# Altium PCB B.O.BREV00 PCB.PcbDoc
Units mil, origin at the board's own origin, x right, y up, seen from the top; angles counter-clockwise.
Board outline 1580 x 3915 mil, 2 copper layers (Top Layer, Bottom Layer); 26 components, 21 nets, 113 pads, 86 vias.
Unrouted connection lines stored in the file: 39.
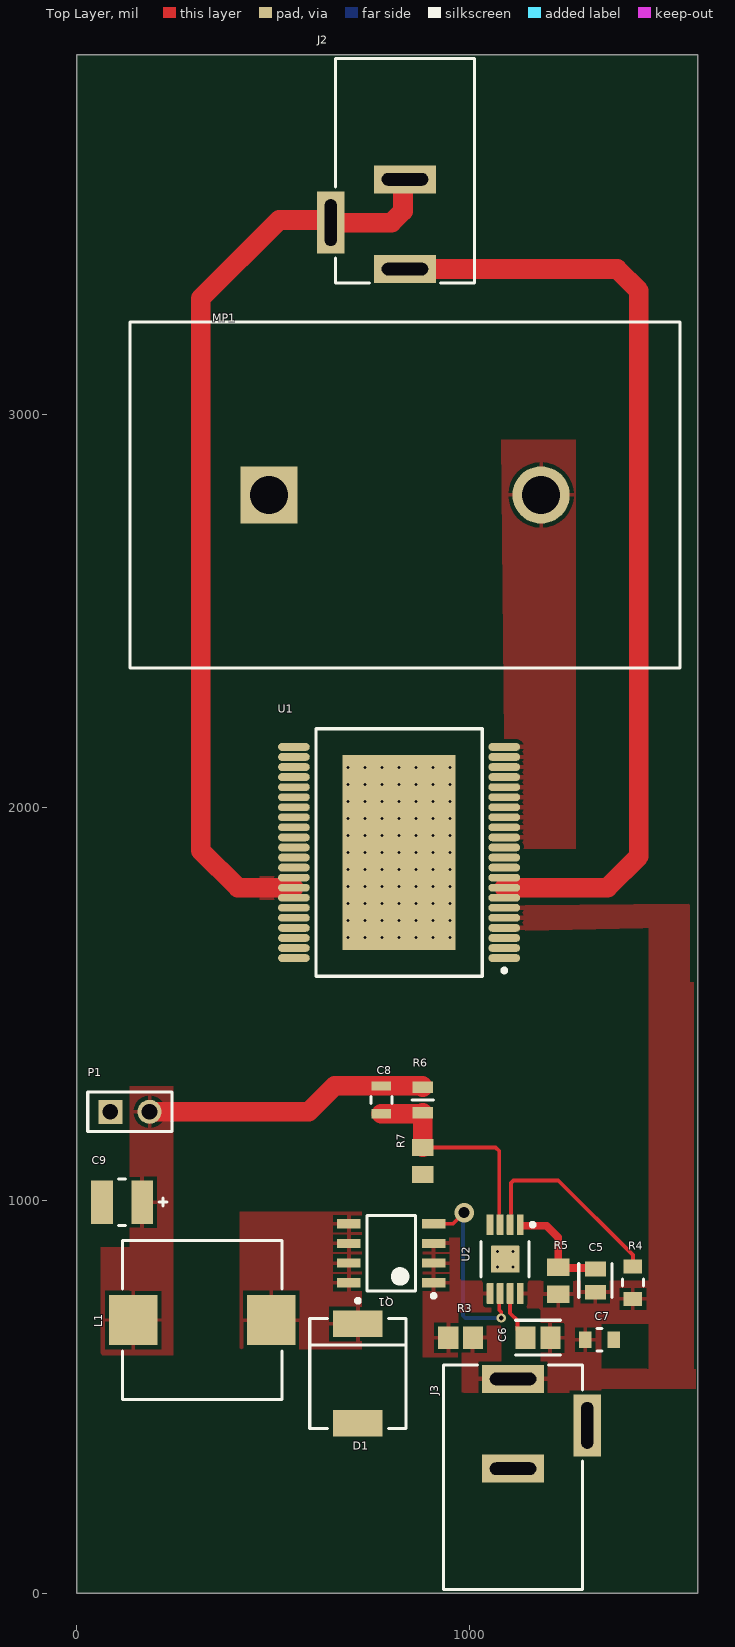
[diagram p0: Top Layer view]
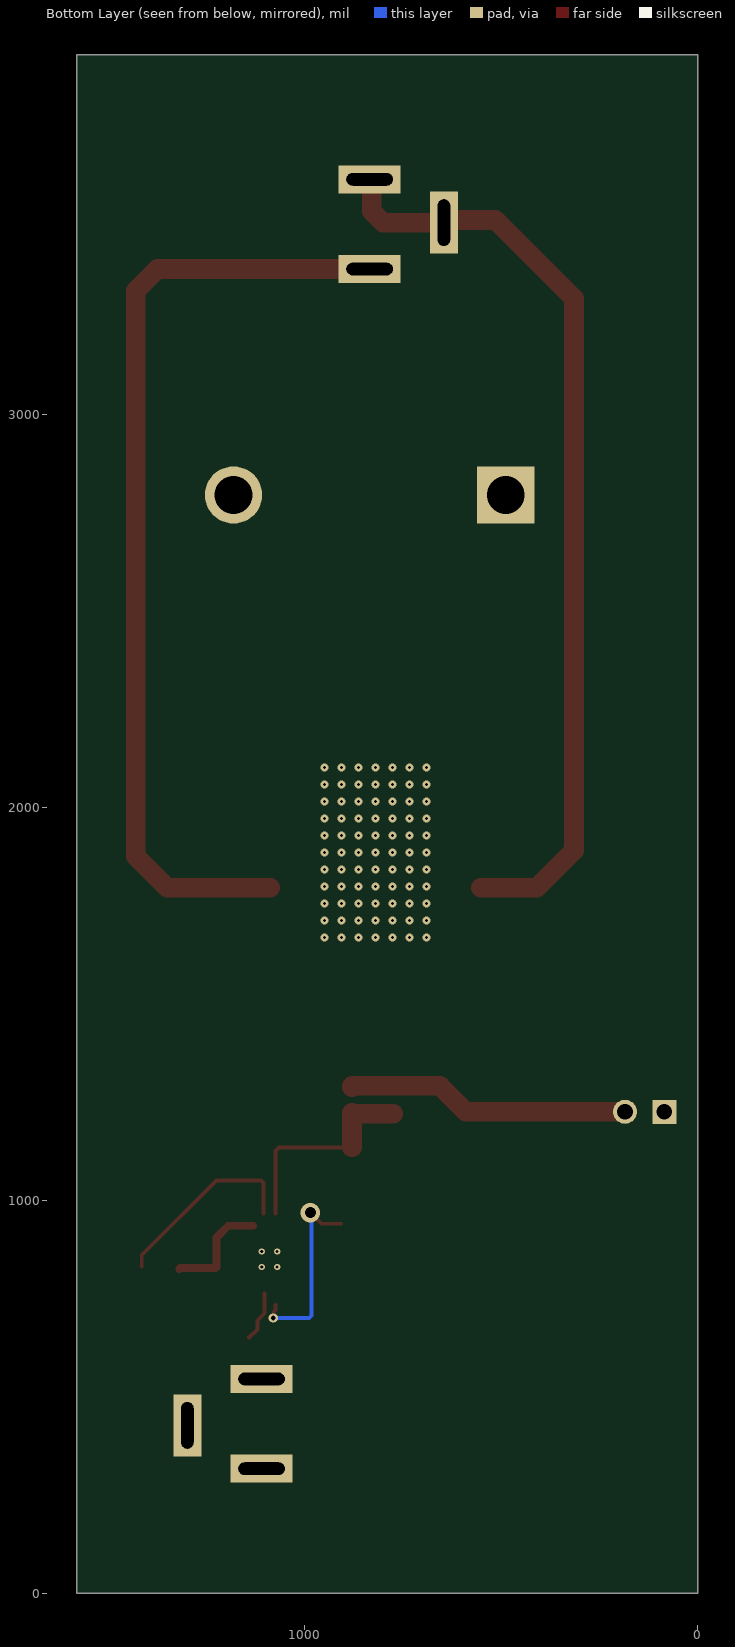
[diagram p1: Bottom Layer view, seen from below]

## Layer stack, top to bottom
Top Solder: solder mask 0.4, Solder Resist, Dk 3.5
Top Layer: signal copper 1.4
Dielectric 1: dielectric 12.6, FR-4, Dk 4.8
Bottom Layer: signal copper 1.4
Bottom Solder: solder mask 0.4, Solder Resist, Dk 3.5

## Board outline
0,0 1580,0 1580,3915 0,3915

## Design rules (kind name [scope] priority, off if disabled: settings)
Clearance [All] p1: gap=10 ignorepadtopadclearanceinfootprint=FALSE except(0: Arc-Hole Track-Hole SMDPad-Hole THPad-Hole Via-Hole Fill-Hole Poly-Hole Region-Hole Text-Hole)
PolygonConnect [All] p1: connectstyle=Relief reliefconductorwidth=10 reliefentries=4 polygonreliefangle="90 Angle" airgapwidth=10
RoomDefinition "Power Management" [InComponentClass('Power Management')] p1: confinementstyle=ConfineIn formatcopy=TRUE lockcomponents=FALSE outline 3194.45,150 7154.45,150 7154.45,850 3194.45,850
RoomDefinition "Motor Driver" [InComponentClass('Motor Driver')] p2: confinementstyle=ConfineIn formatcopy=TRUE lockcomponents=FALSE outline 4260,1488.58 6975,1488.58 6975,2603.58 4260,2603.58
RoutingVias [All] p1: holewidth=28 width=50 viastyle="Through Hole" minholewidth=28 minwidth=50 maxholewidth=28 maxwidth=50
SolderMaskExpansion [All] p1: expansion=4 istentingtop=FALSE
Width [All] p1: maxlimit=100 minlimit=10 preferedwidth=20 minimp=50.000000 maximp=50.000000 favimp=50.000000
30 further rules are at their usual default settings.

## Classes and differential pairs
component class "Power Management": C5 C6 C7 C8 C9 D1 J3 L1 P1 Q1 R3 R4 R5 R6 R7 U2
component class "Motor Driver": C1 C2 C3 C4 J1 J2 MP1 R1 R2 U1

## Components (designator, comment, footprint, x,y, rotation, side; value= is the part's Value field where it differs from the comment)
C1 "100uF, 16V" FP-TAJF-MFG 6395,2328.58 r90 top
C2 "100nF, 16V" CAPC3216X180X55LL20T25 6600,2453.58 r0 top
C3 "47nF, 50V" FP-0805-L_2_01_0_2-W_1_25-IPC_C 6210,2448.58 r0 top
C4 "1uF, 16V" FP-GCM219-0_15-MFG 5855,2458.58 r0 top
C5 "1nF, 25V" FP-C0805C-DN-MFG 1319.49,795.47 r270 top value="1,000 pF"
C6 "470nF, 16V" FP-0805-L_2_01_0_2-W_1_25-IPC_B 1173.28,650 r180 top
C7 "10uF, 16V" FP-C2012-125-0_2-MFG 1330,645 r0 top
C8 "1.1nF, 16V, 0805 (Find new one on Digikey)" FP-GRM216-0_1-MFG 775,1255.43 r270 top
C9 "33uF" FP-TAJB-MFG 115,995 r0 top
D1 "" FP-95402-MFG 715,558.82 r270 top
J1 "5-146256-2" FP-5-146256-2-MFG 6860,2383.58 r0 top
J2 "24V,5A" 694106301002 835,3620 r180 top
J3 "24V,5A" 694106301002 1110,295 r0 top
L1 "10uH, 7.5A" FP-IHLP-4040DZ-FP_3_124x3-MFG 319,695 r180 top
MP1 "R2A-CT4-38E" FP-R2A-CT4-38E-MFG 835,2795 r0 top
P1 "TSW-102-26-G-S" SMTC-TSW-102-26-XX-S 85,1225 r0 top
Q1 "20A" ONSC-SOIC-8-751-07_V 800,865 r180 top
R1 "1K" FP-RC0805-0_6-MFG 6035,2463.58 r0 top
R2 "270R, 1%" FP-CR0805-IPC_B 5680,2448.58 r0 top
R3 "10m" RESC2013X75X55NL20T20 976.5,650 r0 top
R4 "44.2k, 0.1%" FP-RT0805-MFG 1415,790 r90 top value=44.2KΩ
R5 "1.05k" RESC2013X70X40NL20T20 1225,795 r270 top
R6 "10k, 0.1%" FP-MCU0805-IPC_C 880,1255 r90 top
R7 "3.32k.0.1%" RESC2013X55X40NL15T20 880,1100 r90 top
U1 "12VDC, 5A" SOP65P1420X340_HS-45N 820,1885 r180 top
U2 "LM5085MYE/NOPB" DGN0008A_N 1090,850 r270 top

## Footprints (in the part's own frame and the unit in brackets; to place one, negate y for a bottom-side part, rotate by r counter-clockwise, add the part's x,y. Pads: shape width x height; smd on the part's side, far side on the other; paste and mask are expansions set on the pad)
694106301002 [mm] "DC Power Jack Right Angled(6.4)"
  rect 4x1.8 hole 0.8 slot 3 at 0 deg: 1(0,6.35) 2(0,0.55)
  rect 1.8x4 hole 0.8 slot 3 at 90 deg: 3(4.8,3.35)
  silkscreen extent -4.5,-7.25 4.5,7.25, body extent -4.5,-7.25 5,7.25, height 10.75
CAPC3216X180X55LL20T25 [mm] "Chip Capacitor, 2-Leads, Body 3.4x1.8mm, IPC High Density"
  rect 1.15x1.7 smd: 1(-1.275,0) 2(1.275,0)
  silkscreen extent -0.3,-0.75 0.3,0.75, body extent -1.7,-0.9 1.7,0.9, height 1.8
DGN0008A_N [mm] "TSOP, 8-Leads, Body 3.1x3.1mm, Pitch 0.65mm, Thermal Pad 1.85x1.73mm, IPC Medium Density"
  rrect22% 1.35x0.45 smd: 1(-2.225,0.975) 2(-2.225,0.325) 3(-2.225,-0.325) 4(-2.225,-0.975) 5(2.225,-0.975) 6(2.225,-0.325) 7(2.225,0.325) 8(2.225,0.975)
  rrect6% 1.73x1.85 smd: 9(0,0)
  silkscreen extent -2.35,-1.55 1.15,1.9, body extent -2.45,-1.5 2.45,1.5, height 0.94
FP-5-146256-2-MFG [mm]
  rect 0.76x2.29 smd far side paste+0 mask+0: 1(-1.27,-1.395) 2(-1.27,1.395) 3(1.27,-1.395) 4(1.27,1.395)
  rect 1.39x1.39 hole 0.89 paste-1000 mask+0: 1(-1.27,-1.27)
  silkscreen extent -3.31,-2.7 2.59,2.7, body extent -2.69,-2.8 2.69,2.8, height 0.25
FP-0805-L_2_01_0_2-W_1_25-IPC_B [mil]
  rect 51.36x57.33 smd paste+0 mask+0: 1(-31.72,0) 2(31.72,0)
  silkscreen extent -57,-44 57,44, body extent -67,-39 67,39, height 10
FP-0805-L_2_01_0_2-W_1_25-IPC_C [mil]
  rect 43.49x53.39 smd paste+0 mask+0: 1(-27.79,0) 2(27.79,0)
  silkscreen extent -50,-44 50,44, body extent -53,-32 53,32, height 10
FP-95402-MFG [mm]
  rect 1.72x3.2 smd paste+0 mask+0: 1(-3.205,0) 2(3.205,0)
  silkscreen extent -4.82,-3.11 3.55,3.11, body extent -4.17,-3.21 4.17,3.21, height 0.25
FP-C0805C-DN-MFG [mm]
  rect 0.95x1.35 smd paste+0 mask+0: 1(-0.75,0) 2(0.75,0)
  silkscreen extent -1.1,-1.07 1.1,1.07, body extent -1.4,-0.85 1.4,0.85, height 0.25
FP-C2012-125-0_2-MFG [mm]
  rect 0.8x1.05 smd paste+0 mask+0: 1(-0.925,0) 2(0.925,0)
  silkscreen extent -0.15,-0.72 0.15,0.72, body extent -1.43,-0.82 1.43,0.82, height 0.25
FP-CR0805-IPC_B [mil]
  rect 41.66x53.63 smd paste+0 mask+0: 1(-34.53,0) 2(34.53,0)
  silkscreen extent -55,-43 55,43, body extent -65,-37 65,37, height 10
FP-GCM219-0_15-MFG [mm]
  rect 0.7x1.3 smd paste+0 mask+0: 1(-0.95,0) 2(0.95,0)
  silkscreen extent -0.23,-0.7 0.23,0.7, body extent -1.4,-0.8 1.4,0.8, height 0.25
FP-GRM216-0_1-MFG [mm]
  rect 0.6x1.25 smd paste+0 mask+0: 1(-0.9,0) 2(0.9,0)
  silkscreen extent -0.23,-0.67 0.23,0.67, body extent -1.3,-0.77 1.3,0.77, height 0.25
FP-IHLP-4040DZ-FP_3_124x3-MFG [mil]
  rect 122.99x127.99 smd paste+0 mask+0: 1(-176,0) 2(176,0)
  silkscreen extent -203,-203 202,203, body extent -241,-206 241,206, height 10
FP-MCU0805-IPC_C [mil]
  rect 29.87x51.5 smd paste+0 mask+0: 1(-32.55,0) 2(32.55,0)
  silkscreen extent 0,-28 0,28, body extent -51,-31 51,31, height 10
FP-R2A-CT4-38E-MFG [mm]
  rect 3.7x3.7 hole 2.45 paste-1000 mask+0: 1(-8.8,0)
  round 3.7 hole 2.45 paste-1000 mask+0: 2(8.8,0)
  silkscreen extent -17.78,-11.18 17.78,11.18, body extent -17.88,-11.28 17.88,11.28, height 0.25
FP-RC0805-0_6-MFG [mm]
  rect 0.9x1.2 smd paste+0 mask+0: 1(-1.05,0) 2(1.05,0)
  silkscreen extent -0.23,-0.67 0.23,0.67, body extent -1.6,-0.77 1.6,0.77, height 0.25
FP-RT0805-MFG [mm]
  rect 0.9x1.2 smd paste+0 mask+0: 1(-1.05,0) 2(1.05,0)
  silkscreen extent -0.23,-0.67 0.23,0.67, body extent -1.6,-0.77 1.6,0.77, height 0.25
FP-TAJB-MFG [mm]
  rect 1.4x2.8 smd paste+0 mask+0: 1(-1.3,0) 2(1.3,0)
  silkscreen extent -0.23,-1.5 2.9,1.5, body extent -2.1,-1.6 2.1,1.6, height 0.25
FP-TAJF-MFG [mm]
  rect 2x2.8 smd paste+0 mask+0: 1(-2.25,0) 2(2.25,0)
  silkscreen extent -0.87,-1.7 4.15,1.7, body extent -3.35,-1.8 3.35,1.8, height 0.25
ONSC-SOIC-8-751-07_V [mm] "SOIC, 8-Leads, Body 4.9x3.9mm, Pitch 1.27mm"
  rect 1.52x0.6 smd: 1(-2.74,1.905) 2(-2.74,0.635) 3(-2.74,-0.635) 4(-2.74,-1.905) 5(2.74,-1.905) 6(2.74,-0.635) 7(2.74,0.635) 8(2.74,1.905)
  silkscreen extent -2.87,-2.45 1.58,2.88, body extent -1.95,-2.45 1.95,2.45, height 1.75
RESC2013X55X40NL15T20 [mm] "Chip Resistor, 2-Leads, Body 2.00x1.25mm, IPC Medium Density"
  rect 1.1x1.4 smd: 1(-0.875,0) 2(0.875,0)
  body extent -1.07,-0.7 1.08,0.7, height 0.55
RESC2013X70X40NL20T20 [mm] "Chip Resistor, 2-Leads, Body 2.00x1.25mm, IPC Medium Density"
  rect 1.15x1.45 smd: 1(-0.875,0) 2(0.875,0)
  body extent -1.1,-0.72 1.1,0.72, height 0.7
RESC2013X75X55NL20T20 [mm] "Chip Resistor, 2-Leads, Body 2.00x1.25mm, IPC Medium Density"
  rect 1.3x1.45 smd: 1(-0.8,0) 2(0.8,0)
  body extent -1.1,-0.72 1.1,0.72, height 0.75
SMTC-TSW-102-26-XX-S [mm] ".025 SQ Post Terminal Strip Assembly, 1x2 Pins, Vertical, 2.54mm Pitch, Male"
  rect 1.55x1.55 hole 1.02: 1(0,0)
  round 1.55 hole 1.02: 2(2.54,0)
  silkscreen extent -1.46,-1.27 4,1.27, body extent -1.4,-1.27 3.81,1.27, height 8.38
SOP65P1420X340_HS-45N [mm] "SOP, 44-Leads, Body 15.90x11.00mm, Pitch 0.65mm, Thermal Pad 12.60x7.30mm, IPC Medium Density"
  oval 2.05x0.5 smd: 1(-6.8,6.825) 2(-6.8,6.175) 3(-6.8,5.525) 4(-6.8,4.875) 5(-6.8,4.225) 6(-6.8,3.575) 7(-6.8,2.925) 8(-6.8,2.275) 9(-6.8,1.625) 10(-6.8,0.975) 11(-6.8,0.325) 12(-6.8,-0.325) 13(-6.8,-0.975) 14(-6.8,-1.625) 15(-6.8,-2.275) 16(-6.8,-2.925) 17(-6.8,-3.575) 18(-6.8,-4.225) 19(-6.8,-4.875) 20(-6.8,-5.525) 21(-6.8,-6.175) 22(-6.8,-6.825) 23(6.8,-6.825) 24(6.8,-6.175) 25(6.8,-5.525) 26(6.8,-4.875) 27(6.8,-4.225) 28(6.8,-3.575) 29(6.8,-2.925) 30(6.8,-2.275) 31(6.8,-1.625) 32(6.8,-0.975) 33(6.8,-0.325) 34(6.8,0.325) 35(6.8,0.975) 36(6.8,1.625) 37(6.8,2.275) 38(6.8,2.925) 39(6.8,3.575) 40(6.8,4.225) 41(6.8,4.875) 42(6.8,5.525) 43(6.8,6.175) 44(6.8,6.825)
  rect 7.3x12.6 smd: 45(0,0)
  silkscreen extent -6.93,-8 5.38,8, body extent -7.1,-8 7.1,8, height 3.4

## Part data
C1: library part CMP-04424-000049-1, "CAP TANT 100UF 20% 16V 2312", Capacitance=100uF, Case Code (Imperial)=2412, Case Code (Metric)=6032, Case/Package=Molded, Dielectric Material=Tantalum, ESR (Equivalent Series Resistance)=400mR, Leakage Current=16uA, Max Operating Temperature=125°C, Min Operating Temperature=-55°C, Package Quantity=1000, Tolerance=20%, Voltage=16V, Construction=Flat, Depth=3.2mm, Dissipation Factor=10%, Features="General Purpose", Height=2mm, Height - Seated (Max)=0.079inch, Lead Free="Lead Free", Length=6mm, Mount="Surface Mount", Packaging="Tape and Reel", Polarity=Polar, Radiation Hardening=No, REACH SVHC="No SVHC", RoHS Compliant=Yes, Series=TAJ, Termination=SMD/SMT, Voltage Rating=16V, Voltage Rating (DC)=16V, Width=3.2mm
C2: library part CMP-2000-06343-1, "Chip Capacitor, 100 nF, +/- 5%, 25 V, -55 to 125 degC, 1206 (3216 Metric), RoHS, Tape and Reel", Capacitance=0.1µF, Capacitance Tolerance=±5%, Capacitor Case Style=1206[3216Metric], Capacitor Terminals=SMD, Dielectric Characteristic=C0G/NP0, Insulation Resistance=10000Mohm, Manufacturer=Murata, Operating Temperature Max=125°C, Operating Temperature Min=-55°C, Operating Temperature Range=-55°Cto+125°C, Package / Case=1206, Package Description="2-Pin Surface Mount Device, Body 3.2 x 1.6 mm", Temperature Coefficient=0ppm/°C±30ppm/°C, Tolerance +=5%, Voltage Rating=25V, Datasheet URL=https://datasheet.ciiva.com/3777/11308grm31c5c1e104ja0123-3777177.pdf, Datasheet Version=09/2014, External Length / Height=1mm, External Width=0.5mm, Lead Spacing=–, Manufacturer URL=http://www.murata.com/, Mounting Technology=SurfaceMount, MSL=–, No. of Pins=2, Package Reference=1206, Reel Quantity=2000, SVHC=NoSVHC(19-Dec-2012), Terminal Type=SurfaceMount(SMD,SMT), Tolerance -=5%, Voltage Rating V DC=25V
C3: library part CMP-2007-04427-2, "General Purpose Ceramic Capacitor, 0805, 47nF, 10%, X7R, 0.15, 50V", Capacitance=47nF, Case Code (Imperial)=0805, Case Code (Metric)=2012, Dielectric=X7R, Insulation Resistance=100GR, Max Operating Temperature=125°C, Min Operating Temperature=-55°C, Package Quantity=1, Tolerance=10%, Voltage=50V, Case/Package=0805, Construction=Flat, Contact Plating=Tin, Depth=1.25mm, Dissipation Factor=2.5%, Height=0.94mm, Lead Free="Lead Free", Length=2.01mm, Mount="Surface Mount", Number of Pins=2, Packaging="Tape and Reel", Radiation Hardening=No, REACH SVHC="No SVHC", RoHS Compliant=Yes, Series=-, Termination=SMD/SMT, Thickness=0.037inch, Voltage Rating=50V, Voltage Rating (DC)=50V, Width=1.25mm
C4: library part CMP-2007-00086-2, "Ceramic Capacitor for Automotive 1uF  ±10% 16VDC X7R 0805 Paper T/R", Capacitance=1uF, Case Code (Imperial)=0805, Case Code (Metric)=2012, Dielectric=X7R, Max Operating Temperature=125°C, Min Operating Temperature=-55°C, Package Quantity=4000, Ratings=AEC-Q200, Tolerance=10%, Voltage=16V, Case/Package=0805, Depth=1.25mm, Height=0.85mm, Lead Free="Lead Free", Length=2mm, Mount="Surface Mount", Packaging="Tape and Reel", Radiation Hardening=No, Termination=SMD/SMT, Thickness=0.037inch, Voltage Rating=16V, Voltage Rating (DC)=16V, Width=0.049inch
C5: library part CMP-2007-01131-2, "CAP CER 1000PF 25V X7R 0805", Capacitance="1,000 pF", Manufacturer=KEMET, Manufacturer Part Number=C0805C102K3RACTU, Package=C0805C-DN, Temperature="-55°C to +125°C", Temperature Characteristic=X7R, Temperature Coefficient=30ppm/°C, Temperature Range High=+125°C, Temperature Range Low=-55°C, Tolerance=0.1, Voltage Rating="25 V", Automotive=No, Category=Cap, ComponentLink2Description=Datasheet, ComponentLink2URL=https://content.kemet.com/datasheets/KEM_C1003_C0G_SMD.pdf, Device Class L1="Passive Components", Device Class L2=Capacitors, Device Class L3="Ceramic Capacitors", Digikey Description="CAP CER 1000PF 25V X7R 0805", Height=0.88mm, Ipc Land Pattern Name=CAPC200125X78, Lead Free=Yes, Material=Ceramic, Mouser Description="Cap Ceramic 0.001uF 25V X7R 10% SMD 0805 125°C Paper T/R", Octopart=https://octopart.com/c0805c102k3ractu-kemet-16646211, RoHS=TRUE
C6: library part CMP-2007-04653-2, "General Purpose Ceramic Capacitor, 0805, 470nF, 10%, X7R, 15%, 16V", Capacitance=470nF, Case Code (Imperial)=0805, Case Code (Metric)=2012, Dielectric=X7R, Insulation Resistance=100GR, Max Operating Temperature=125°C, Min Operating Temperature=-55°C, Package Quantity=1, Tolerance=10%, Voltage=16V, Case/Package=0805, Construction=Flat, Contact Plating=Tin, Depth=1.25mm, Dissipation Factor=3.5%, Height=1.4mm, Lead Free="Lead Free", Length=2.01mm, Mount="Surface Mount", Number of Pins=2, Packaging="Tape and Reel", Radiation Hardening=No, REACH SVHC="No SVHC", RoHS Compliant=Yes, Series=-, Size=1.4mm, Termination=SMD/SMT, Thickness=0.055inch, Voltage Rating=16V, Voltage Rating (DC)=16V, Width=1.25mm
C7: library part CMP-08246-003655-1, "Multilayer Ceramic Capacitors 10μF ±10% 16V X6S SMD 0805", Capacitance=10uF, Case Code (Imperial)=0805, Case Code (Metric)=2012, Dielectric=X6S, Dielectric Material=Ceramic, Max Operating Temperature=105°C, Min Operating Temperature=-55°C, Package Quantity=1, Tolerance=10%, Voltage Rating=16V, Case/Package=0805, Construction=Flat, Contact Plating=Tin, Depth=1.25mm, Height=1.25mm, Lead Free="Lead Free", Length=2mm, Mount="Surface Mount", Packaging="Tape and Reel", REACH SVHC="No SVHC", RoHS Compliant=Yes, Series=C, Thickness=0.057inch, Voltage Rating (DC)=16V, Width=0.049inch
C8: library part CMP-2007-00909-2, "Chip Multilayer Ceramic Capacitors for General Purpose, 0805, 1100pF, C0G, 30ppm/°C, 5%, 100V", Capacitance=1.1nF, Case Code (Imperial)=0805, Case Code (Metric)=2012, Dielectric=C0G, Max Operating Temperature=125°C, Min Operating Temperature=-55°C, Package Quantity=4000, Tolerance=5%, Voltage Rating=100V, Case/Package=0805, Construction=Flat, Depth=1.25mm, Height=0.6mm, Length=2mm, Mount="Surface Mount", Packaging="Tape and Reel", Radiation Hardening=No, RoHS Compliant=Yes, Series=GRM, Termination=SMD/SMT, Thickness=0.028inch, Voltage Rating (DC)=100V, Weight=0.000194oz, Width=0.049inch
C9: library part CMP-04424-000306-1, "33uF 6.3V  ±10% 2.2Ω 1210  SMD Tantalum Capacitor", Case Code (Imperial)=1210, Case Code (Metric)=3528, Dielectric Material=Tantalum, ESR (Equivalent Series Resistance)=2.2R, Leakage Current=2.1uA, Max Operating Temperature=125°C, Min Operating Temperature=-55°C, Package Quantity=1, Tolerance=20%, Voltage=10V, Voltage Rating=6.3V, Capacitance=33uF, Case/Package=1210, Construction=Flat, Depth=2.8mm, Dissipation Factor=6%, Features="General Purpose", Height=1.9mm, Height - Seated (Max)=0.083inch, Lead Free="Lead Free", Lead Pitch=1.4mm, Length=3.5mm, Mount="Surface Mount", Number of Pins=2, Packaging="Tape and Reel", Polarity=Polar, Radiation Hardening=No, REACH SVHC="No SVHC", RoHS Compliant=Yes, Series=TAJ, Termination=SMD/SMT, Voltage Rating (DC)=6.3V, Width=2.8mm
D1: library part CMP-02539-000012-1, "DIODE SCHOTTKY 40V 3A DO214AB", Forward Current=3A, Manufacturer=Vishay, Manufacturer Part Number=SS34-E3/57T, Max Junction Temp=+150°C, Max Repetitive Reverse Voltage=40V, Max Surge Forward Current=100A, Package=95402, Peak Reverse Current=0.5mA, Temperature="-55°C to +150°C", Temperature Range Low=-55°C, Automotive=No, Category=Diode, ComponentLink2Description=Datasheet, ComponentLink2URL=http://www.vishay.com/docs/88751/ss32.pdf, Device Class L1="Discrete Semiconductors", Device Class L2=Diodes, Device Class L3="Schottky Diodes", Digikey Description="DIODE SCHOTTKY 40V 3A DO214AB", Footprint Url=http://www.vishay.com/docs/95402/smc.pdf, Height=2.62mm, Lead Free=Yes, Mouser Description="Schottky Diodes & Rectifiers 3.0 Amp 40 Volt", Octopart=https://octopart.com/ss34-e3%2F57t-vishay-39552907, RoHS=TRUE, Standoff Height=0mm, Temperature Range High=+150°C
J1: library part CMP-03369-000128-1, "CONN HEADER VERT 4POS 2.54MM", Color=Black, Contact Current Rating=3A, Flammability Rating="UL94 V-0", High Temperature Housing=Yes, Insulation Resistance=5GR, Max Operating Temperature=105°C, Min Operating Temperature=-65°C, Package Quantity=500, Voltage Rating=750V, Approvals=CSA, Board Standoff="Yes (With)", Connector Type=Plug, Contact Gender=Male, Contact Material=Bronze, Contact Mating Length=0.23inch, Contact Plating=Gold, Contact Post Length=0.12inch, Contact Protection="No (Without)", Contact Shape=Square, Contact Type="Male Pin", Current Rating=3A, Depth=4.88mm, Gasket="No (Without)", High Speed Serial Data Connector=No, Housing Color=Black, Housing Material=Thermoplastic, Keyed=No, Length=4.67mm, Mating Alignment="No (Without)", Mating Connector Lock="No (Without)", Mount="Through Hole", Number of Contacts=4, Number of Positions=4, Number of Rows=2, Orientation=Straight, Packaging=Carton, PCB Mount Retention=Without, PCB Mounting Orientation=Vertical, PCB Thickness=0.062inch, Pitch=2.54mm, Radiation Hardening=No, RoHS Compliant=Yes, Row Spacing=2.54mm, Selectively Loaded="No (Without)", Series="AMPMODU MOD II", Stabilizers="No (Without)", Strain Relief="No (Without)", Termination="Through Hole"
J2 J3: library part CMP-1502-00188-1, "DC Power Jack Connector WR-DC, Male, Right Angled, THT, 5 A, 24 V", Manufacturer="Wurth Elektronik", Operating Temperature=-40to85degC, Package Reference=694106301002, Rated Current=5A, Working Voltage=24V, Datasheet URL=http://katalog.we-online.de/em/datasheet/6941xx301002.pdf, Gender=Male, Manufacturer URL=http://www.we-online.de, Mounting Technology=THT, Opening Diameter=6.4mm, Orientation=RightAngled, Packaging=Bag, Part Number=694106301002, Plug Inner Diameter=2.05mm, Plug Outer Diameter=5.5mm, Publisher=WurthElektronik
L1: library part CMP-02424-000252-1, "Commercial Inductors, Low DCR Series 10uH 7.5A 30.5mΩ 20%", Case/Package=4040, Current Rating=7.5A, DC Resistance (DCR)=30.5mR, Inductance=10uH, Inductance Tolerance=20%, Max DC Current=7.1A, Max Operating Temperature=125°C, Min Operating Temperature=-55°C, Package Quantity=500, Self Resonant Frequency=1MHz, Test Frequency=100kHz, Contact Plating=Tin, Core Material=Metal, Depth=10.3mm, Height=4mm, Height - Seated (Max)=0.157inch, Lead Free="Lead Free", Length=10.92mm, Military Standard=Not, Mount="Surface Mount", Number of Pins=2, Packaging="Tape and Reel", Radiation Hardening=No, RMS Current (Irms)=7.5A, Saturation Current=7.1A, Shielding=Shielded, Termination=SMD/SMT, Tolerance=20%, Width=10.3mm
MP1: library part CMP-33535-000008-1, "HEATSINK FOR TO-247", Case/Package=TO-247, Color=Black, Natural Thermal Resistance=8.6°C/W, Package Quantity=5, Thermal Resistance @ Forced Air Flow (100 LFM)=1°C/W, Finish=Anodized, Height=22mm, Height Off Base=0.87inch, Lead Free="Lead Free", Length=1.5inch, Material=Aluminium, Mount=Clip, Package Cooled=TO-247, RoHS Compliant=Yes, Series=R2, Shape=Fins, Type=Passive, Weight=6.4oz, Width=1.38inch
P1: library part CMP-1024-00327-1, "0.025\" SQ Post Header, Through-hole, Vertical, -55 to 125 degC, 2.54 mm Pitch, 2-Pin, Male, RoHS", Manufacturer=Samtec, Temperature Range="-55 to 125 degC", ComponentLink1Description="Manufacturer URL", ComponentLink1URL=http://www.samtec.com, ComponentLink2Description=Datasheet, ComponentLink2URL=http://www.samtec.com/documents/webfiles/pdf/TSW_TH.PDF, ComponentLink3Description="Package Specification", ComponentLink3URL=http://www.samtec.com/documents/webfiles/cpdf/TSW-XXX-XX-XXX-X-XX-XXX-MKT.pdf, DatasheetVersion=F-214, Mounting Technology=Through-hole, Orientation=Vertical, PackageDescription=".025[0.64] SQ. Post Terminal Strip Assembly", PackageReference=TSW-102-26-XX-S, PackageVersion="DM, 8/1988", PartNumber=TSW-102-26-G-S, Pitch="2.54 mm", RoHS=True
Q1: library part CMP-1058-00697-1, "Power MOSFET, -10 A, -20 V, Single P-Channel Enhancement-Mode, 8-Pin SOIC, Pb-Free, Tape and Reel", Manufacturer="On Semiconductor", Package Type=SOIC-8, PartNumber=NTMS10P02R2G, Channel Polarity="P Channel", Ciss Typ (pF)=3100, ComponentLink1Description="Manufacturer URL", ComponentLink1URL=http://www.onsemi.com/, ComponentLink2Description=Datasheet, ComponentLink2URL=http://www.onsemi.cn/pub_link/Collateral/NTMS10P02R2-D.PDF, ComponentLink3Description="Package Specification", ComponentLink3URL=http://www.onsemi.com/pub_link/Collateral/751-07.PDF, Configuration=Single, Coss Typ (pF)=1100, Crss Typ (pF)=475, DatasheetVersion="Rev. 3", Mounting Technology="Surface Mount", PackageDescription="8-Pin Small Outline Integrated Circuit, Body 4.9 x 3.9 mm, Pitch 1.27 mm", PackageReference=SOIC-8-751-07, PackageVersion="Rev. AK, 02/2011", Packing="Tape and Reel", Qrr Typ (nC)=75, RoHS=Pb-Free, V(BR)DSS Min (V)=20, VGS Max (V)=12, VGS(th) Max (V)=1.2
R1: library part CMP-03412-037820-1, "RES SMD 1K OHM 5% 1/8W 0805", Case Code (Imperial)=0805, Case Code (Metric)=2012, Max Operating Temperature=155°C, Max Power Dissipation=125mW, Min Operating Temperature=-55°C, Resistance=1kR, Resistance Tolerance=5%, Resistor Type="Thick Film", Temperature Coefficient=100ppm/°C, Voltage Rating=150V, Case/Package=0805, Construction=Rectangular, Contact Plating=Tin, Depth=1.25mm, Features="Moisture Resistant", Lead Free="Lead Free", Length=2mm, Military Standard=Not, Number of Terminations=2, Packaging="Tape and Reel", Power Rating=125mW, Radiation Hardening=No, RoHS Compliant=Yes, Series=RC, Size Code=0805, Termination=SMD/SMT, Tolerance=5%
R2: library part CMP-07231-005969-1, "Thick Film Chip Resistors 0805 270Ω 0.125W 1% 100ppm/°C", Case Code (Imperial)=0805, Case Code (Metric)=2012, Max Operating Temperature=155°C, Max Power Dissipation=125mW, Min Operating Temperature=-55°C, Package Quantity=5000, Resistance=270R, Temperature Coefficient=100ppm/°C, Tolerance=1%, Voltage Rating=150V, Case/Package=0805, Composition="Thick Film", Contact Plating=Tin, Depth=1.25mm, Features="Moisture Resistant", Height=0.024inch, Length=2mm, Military Standard=Not, Mount="Surface Mount", Number of Terminations=2, Packaging="Tape and Reel", Power Rating=125mW, Radiation Hardening=No, Termination=SMD/SMT, Thickness=508um, Width=1.25mm
R3: library part CMP-2001-04363-1, Manufacturer=Panasonic, Part Number=ERJ-6BWFR010V
R4: library part CMP-03412-006606-1, "RES SMD 44.2K OHM 0.1% 1/8W 0805", Manufacturer=Yageo, Manufacturer Part Number=RT0805BRD0744K2L, Package=RT0805, Power Rating=0.125W, Resistance=44.2KΩ, Temperature="-55°C to +155°C", Temperature Coefficient="25 ppm/°C", Temperature Range High=+155°C, Temperature Range Low=-55°C, Tolerance=0.0025, Voltage Rating=150V, Automotive=No, Category=Res, ComponentLink2Description=Datasheet, ComponentLink2URL=http://www.yageo.com/documents/recent/PYu-RT_1-to-0.01_RoHS_L_9.pdf, Composition="Thin Film", Device Class L1="Passive Components", Device Class L2=Resistors, Device Class L3="Chip SMD Resistors", Digikey Description="RES SMD 44.2K OHM 0.1% 1/8W 0805", Footprint Url=http://www.yageo.com/exep/pages/download/literatures/PYu-R_Mount_10.pdf, Height=0.6mm, Ipc Land Pattern Name=RESC200125X50, Lead Free=Yes, Mouser Description="Thin Film Resistors - SMD 1/8W 44.2K ohm .1% 25ppm", Octopart=https://octopart.com/rt0805brd0744k2l-yageo-1480106, RoHS=TRUE, Series=RT
R5: library part CMP-2001-04384-1, Manufacturer=Panasonic, Part Number=ERJ-6ENF1051V
R6: library part CMP-02407-001182-1, "RES 1.05K OHM 0.5% 1/5W 0805", Case Code (Imperial)=0805, Case Code (Metric)=2012, Max Operating Temperature=125°C, Min Operating Temperature=-55°C, Power Rating=50mW, Resistance=10kR, Temperature Coefficient=25ppm/°C, Tolerance=0.1%, Voltage Rating=150V, Case/Package=0805, Composition="Thin Film", Contact Plating=Tin, Depth=1.25mm, Lead Free="Lead Free", Length=2mm, Military Standard=Not, Mount="Surface Mount", Packaging="Tape and Reel", Radiation Hardening=No, REACH SVHC="No SVHC", Voltage Rating (DC)=150V, Width=1.25mm
R7: library part CMP-2001-04771-1, Manufacturer="Vishay Dale", Part Number=TNPW08053K32BEEN
U1: library part MC33931VWR2, "- Motor Driver CMOS Parallel 44-HSOP"
U2: library part CMP-0069-01300-3, "75V Constant On-Time PFET Buck Switching Controller, 8-pin eMSOP, Pb-Free", Manufacturer="Texas Instruments", PackageTopMarking=ZXTT*SSSB, PowerWise=Y, Code_JEDEC=MO-187-AA, ComponentLink1Description="Datasheet URL", ComponentLink1URL=http://www.ti.com/general/docs/lit/getliterature.tsp?genericPartNumber=LM5085&fileType=pdf, CompType=Switcher, PackageDescription="Molded Mini-SO, Exposed Pad, .118 x .118 x .034in Body, 8 Lead, .0256in Pitch", PackageReference=DGN0008A, PinCount=8, RoHS=Y

## Via types
v1: diameter 19.68, hole 7.87, Top Layer to Bottom Layer, 77 vias
v2: diameter 15.75, hole 7.87, Top Layer to Bottom Layer, 4 vias
v3: diameter 54.72, hole 35.04, Top Layer to Bottom Layer, 3 vias
v4: diameter 23.6, hole 11.8, Top Layer to Bottom Layer, 1 vias
v5: diameter 50, hole 28, Top Layer to Bottom Layer, 1 vias

## Nets (pads, with @x,y where several pads share a name; then routed paths per layer and width w, separated by ;. In a path a pad name is that pad's centre, name@x,y a point inside that pad or via, vN(x,y) a via of type N, cw(c..) or ccw(c..) an arc to the next point about the centre after c; other vN are vias at no path point)
+12: C1.2 C2.2 C3.1 C5.2 C6.1 C7.1 J3.1 R3.2 R4.1 R5.2 U1.4 U1.5 U1.6 U1.39 U1.40 U2.8
GND: C1.1 C2.1 C4.2 C7.2 C9.1 D1.2 J3.2 J3.3 P1.1 R2.1 R7.1 U1.10 U1.11 U1.34 U1.35 U2.4
INPUT_1: J1.2 U1.43
  other v3: 6810,2433.58
INPUT_2: J1.4 U1.42
  other v3: 6910,2433.58
INPUT_3: J1.1 U1.1
INPUT_4: J1.3 U1.3
  other v3: 6910,2333.58
ISEN: Q1.1 Q1.2 Q1.3 R3.1 U2.5
NetC3_2: C3.2 U1.41
NetC4_1: C4.1 R2.2 U1.2
NetC5_1: C5.1 R5.1 U2.1 | length 277.7
  Top Layer w20: U2.1@1131.65,935 1195,935 1225,905 R5.1 1227.22,827.22 1317.26,827.22 C5.1
NetC6_2: C6.2 U2.7 | length 128.5
  Top Layer w10: U2.7 1102.8,712.2 1120.87,694.13 1120.87,670.68 C6.2
NetC8_1: C8.1 C9.2 L1.2 P1.2 R1.2 R6.2 | length 725.2
  Top Layer w50: P1.2 590,1225 655.87,1290.87 C8.1 879.25,1290.87 880,1290.11 R6.2
NetC8_2: C8.2 R6.1 R7.2 U2.3 | length 551
  Top Layer w10: R7.2 1065.55,1134.45 1075,1125 1075,966.2
  Top Layer w50: C8.2 879.25,1220 R6.1@880,1220.75 ; R7.2 R6.1@880,1220.75 ; R6.1 R6.1@880,1220.75
NetD1_1: D1.1 L1.1 Q1.5 Q1.6 Q1.7 Q1.8
NetJ2_1: J2.1 U1.7 U1.8 U1.9 | length 2433
  Top Layer w50: J2.1 1375,3370 1430,3315 1430,1875 1350.43,1795.43 U1.8
NetJ2_2: J2.2 J2.3 U1.36 U1.37 U1.38 | length 2377.3
  Top Layer w50: U1.37 409.57,1795.43 315,1890 315,3295 515,3495 639.13,3495 J2.3 800.71,3488.11 830,3517.4 830,3593.35 J2.2
NetMP1_1: MP1.1 U1.23 U1.24 U1.25 U1.26 U1.27 U1.28 U1.29 U1.30 U1.31 U1.32 U1.33
NetMP1_2: MP1.2 U1.12 U1.13 U1.14 U1.15 U1.16 U1.17 U1.18 U1.19 U1.20 U1.21 U1.22
NetQ1_4: Q1.4 U2.6 | length 488.6
  Top Layer w10: Q1.4 957.43,940 v5(985.75,968.32) ; 1075,733.8 1075,720 1080,715 v4(1080,700)
  Bottom Layer w10: v5(985.75,968.32) 982.93,965.5 982.93,705.86 988.79,700 v4(1080,700)
NetR1_1: R1.1 U1.44
NetR4_2: R4.2 U2.2 | length 497.7
  Top Layer w10: 1105,966.2 1105,1044.14 1110.86,1050 1225,1050 1415,860 R4.2
pads on no net: U1.45 U2.9
copper on no net:
  other v1: 690.08,1668.46 733.39,1668.46 776.69,1668.46 820,1668.46 863.31,1668.46 906.61,1668.46 949.92,1668.46 690.08,1711.77 733.39,1711.77 776.69,1711.77 820,1711.77 863.31,1711.77 906.61,1711.77 949.92,1711.77 690.08,1755.08 733.39,1755.08 776.69,1755.08 820,1755.08 863.31,1755.08 906.61,1755.08 949.92,1755.08 690.08,1798.39 733.39,1798.39 776.69,1798.39 820,1798.39 863.31,1798.39 906.61,1798.39 949.92,1798.39 690.08,1841.69 733.39,1841.69 776.69,1841.69 820,1841.69 863.31,1841.69 906.61,1841.69 949.92,1841.69 690.08,1885 733.39,1885 776.69,1885 820,1885 863.31,1885 906.61,1885 949.92,1885 690.08,1928.31 733.39,1928.31 776.69,1928.31 820,1928.31 863.31,1928.31 906.61,1928.31 949.92,1928.31 690.08,1971.61 733.39,1971.61 776.69,1971.61 820,1971.61 863.31,1971.61 906.61,1971.61 949.92,1971.61 690.08,2014.92 733.39,2014.92 776.69,2014.92 820,2014.92 863.31,2014.92 906.61,2014.92 949.92,2014.92 690.08,2058.23 733.39,2058.23 776.69,2058.23 820,2058.23 863.31,2058.23 906.61,2058.23 949.92,2058.23 690.08,2101.54 733.39,2101.54 776.69,2101.54 820,2101.54 863.31,2101.54 906.61,2101.54 949.92,2101.54
  other v2: 1070.31,830.32 1109.68,830.32 1070.31,869.68 1109.68,869.68

## Polygon pours and split planes (outlines as drawn)
NetMP1_2 on Top Layer "NETMP1_2_L01_P015" (solid, pour order 15): 1087.72,2123.11 1090.83,2120 1270,2120 1270,2935 1080,2935
NetMP1_2 on Top Layer "NETMP1_2_L01_P014" (solid, pour order 14): 1075,1895 1075,2165 1270,2165 1270,1895
NetJ2_2 on Top Layer "NETJ2_2_L01_P013" (solid, pour order 13): 590,1825 590,1765 465,1765 465,1825
+12 on Top Layer "+12_L01_P011" (solid, pour order 11): 1455,1540 1455,1715 1560,1709.88 1560,1540
+12 on Top Layer "+12_L01_P010" (solid, pour order 10): 1050,1750 1050,1684.39 1560,1695 1560,1755
+12 on Top Layer "+12_L01_P008" (solid, pour order 8): 1570,520 1570,1555 1525,1555 1455,1555 1455,520
+12 on Top Layer "+12_L01_P007" (solid, pour order 7): 1040,575 1040,520 1575,520 1575,570.05
ISEN on Top Layer "ISEN_L01_P005" (solid, pour order 5): 875,905 880,900 880,600 970,600 970,715 1055,715 1055,795 980,795 975,800 975,905
NetC8_1 on Top Layer "NETC8_1_L01_P006" (solid, pour order 6): 135,1290 135,770 213.48,770 214.49,769 245,799.51 245,1290
NetC8_1 on Top Layer "NETC8_1_L01_P004" (solid, pour order 4): 60,880 60,610 65,605 245,605 245,880
NetD1_1 on Top Layer "NETD1_1_L01_P003" (solid, pour order 3): 725,970 725,620 415,620 415,970
+12 on Top Layer "+12_L01_P002" (solid, pour order 2): 980,680 980,505 985,510 1198.74,510 1198.74,590.43 1193.31,585 1080,585 1080,675 1085,680
+12 on Top Layer "+12_L01_P001" (solid, pour order 1): 1485,795 1485,685 1180,685 1180,720 1175,725 1128.39,725 1128.39,795 1225,795
+12 on Top Layer "+12_L01_P000" (solid, pour order 0): 1030,580 1030,510 1335,510 1335,695 1190,695 1180,685 1180,580